# Altium PCB PCB1.PcbDoc (part 1 of 2)
Units mm, origin at the board's own origin, x right, y up, seen from the top; angles counter-clockwise.
Board outline 100 x 90 mm, 2 copper layers (Top Layer, Bottom Layer); 112 components, 100 nets, 469 pads, 191 vias.
Unrouted connection lines stored in the file: 2.
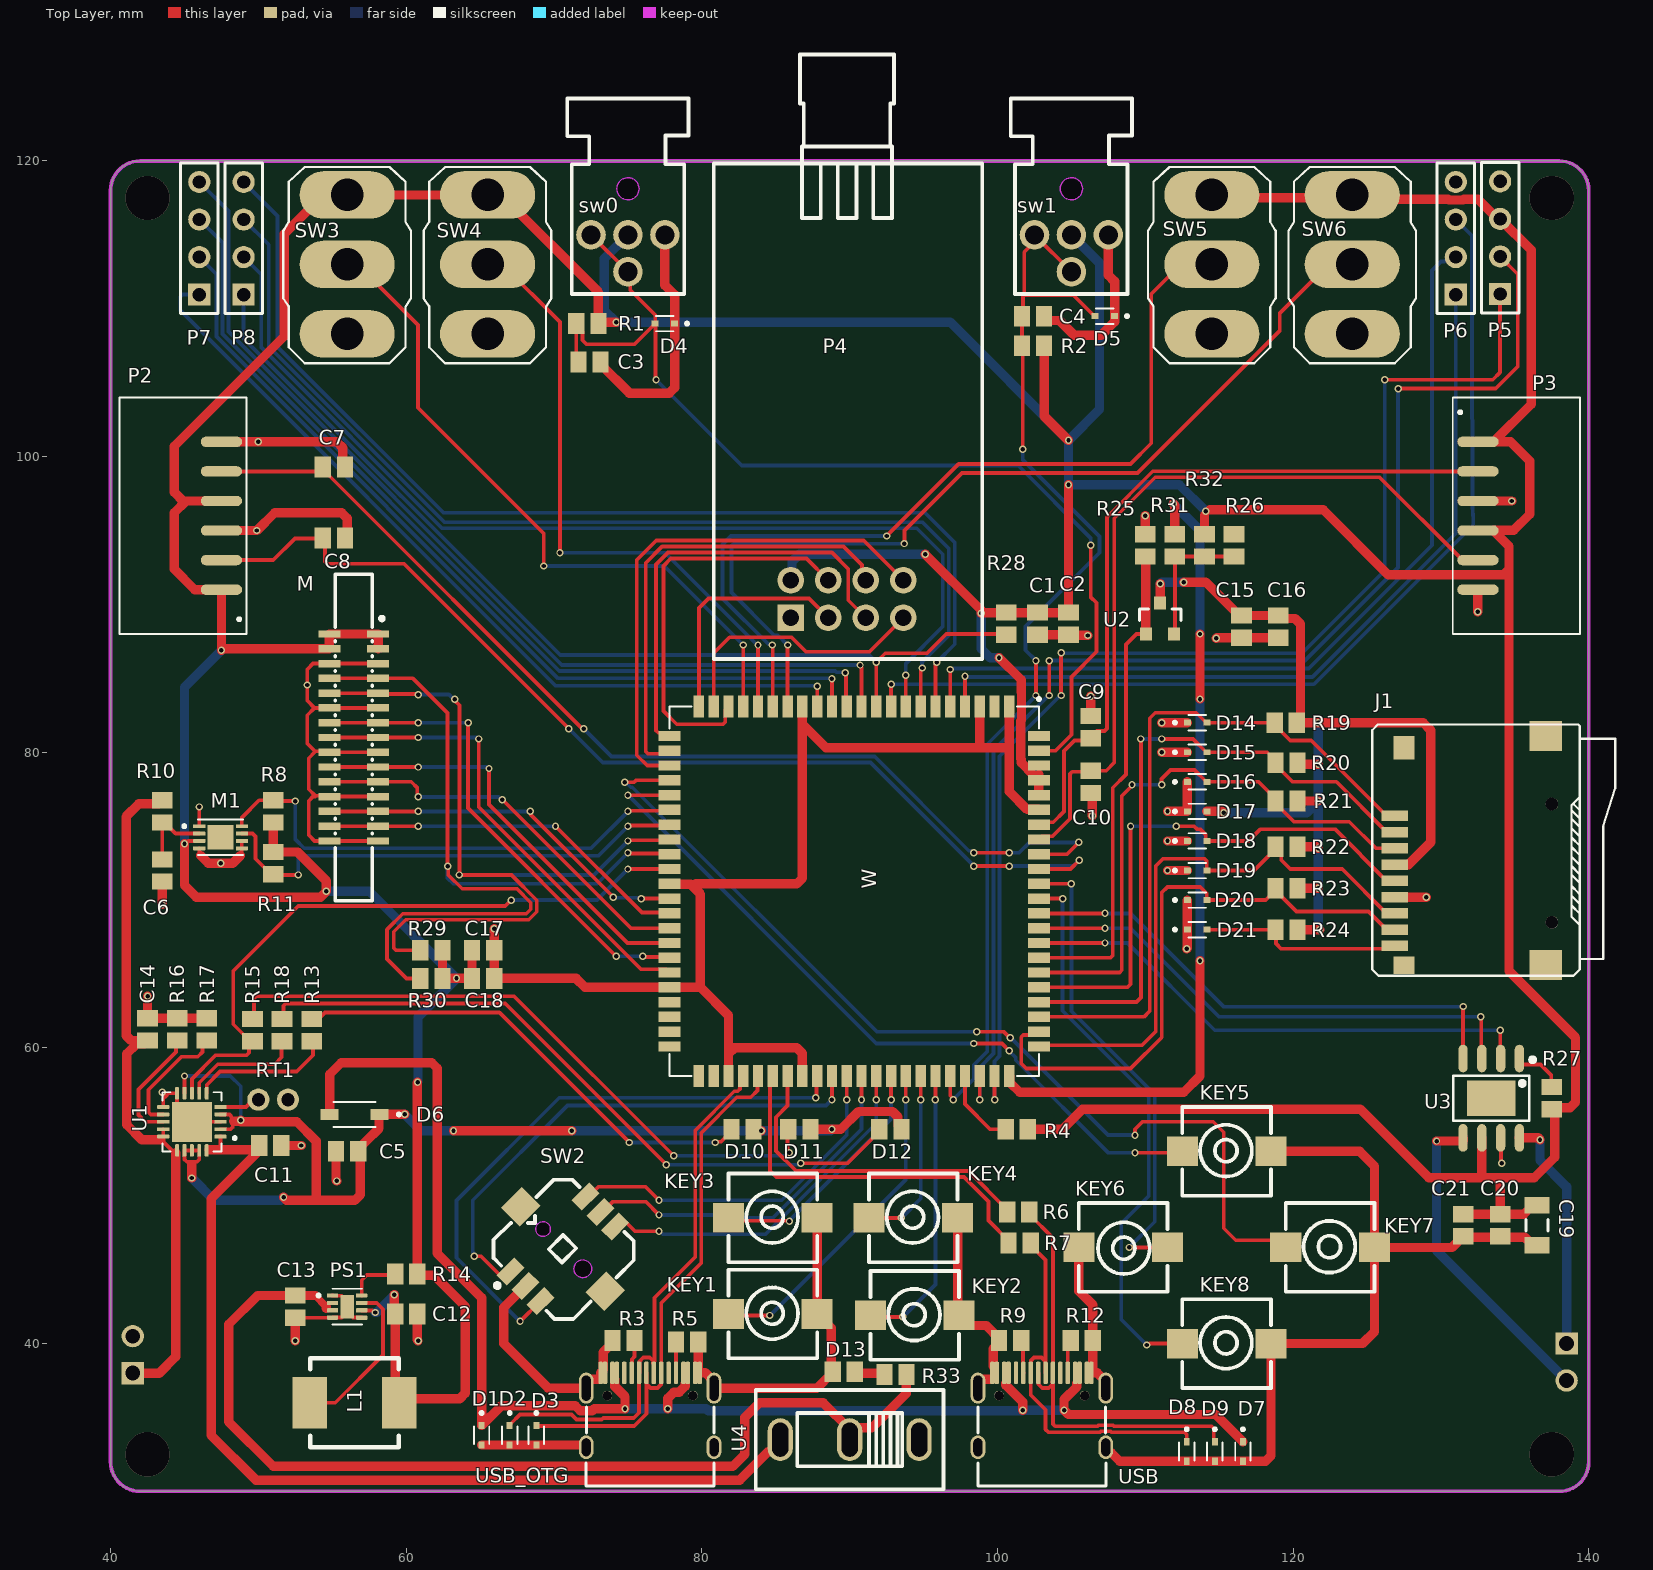
[diagram p0: Top Layer view]
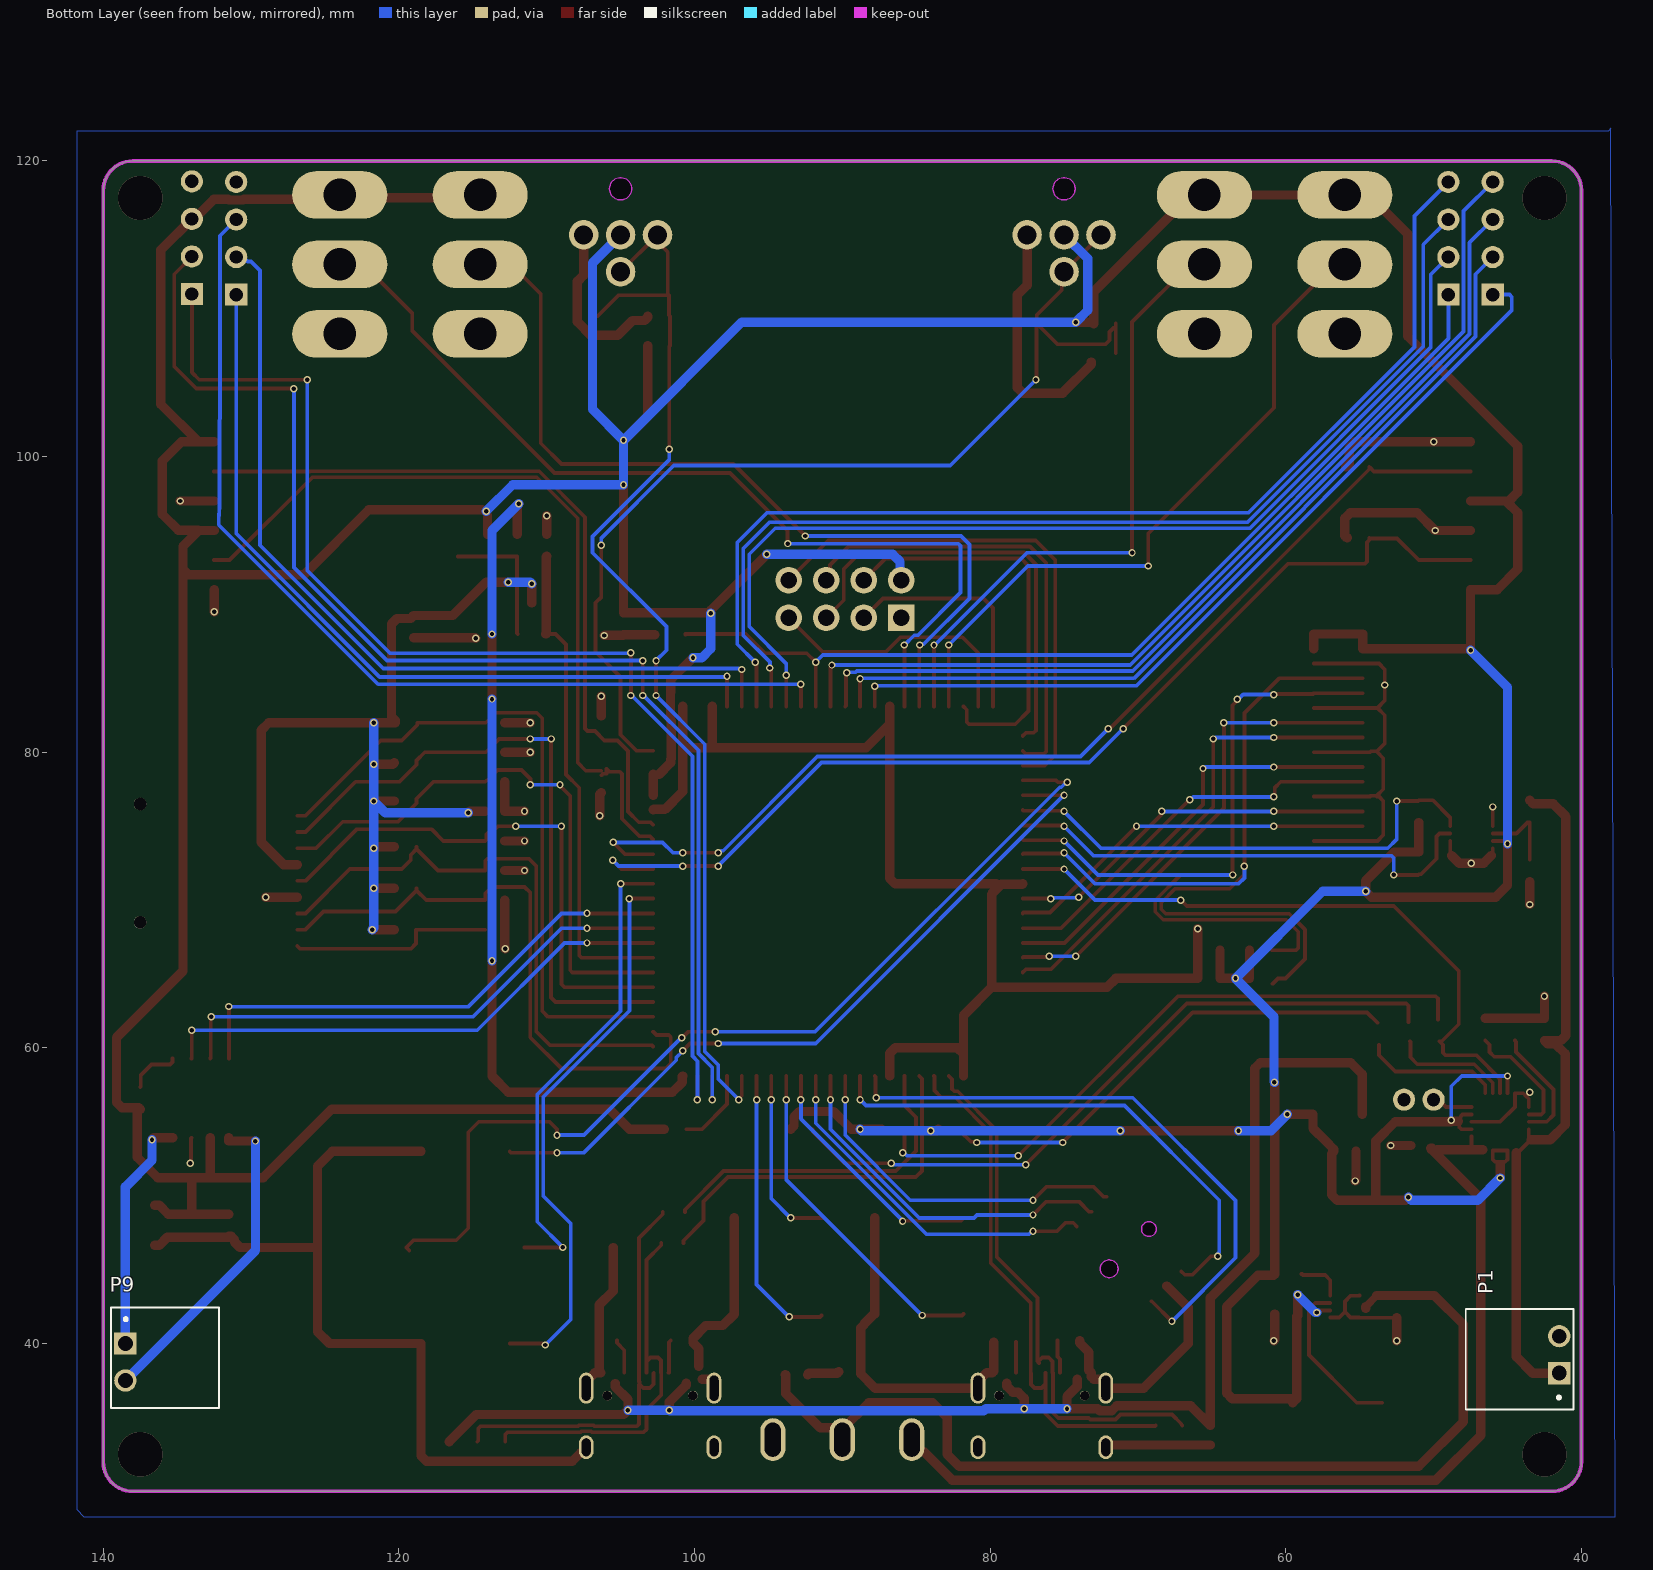
[diagram p1: Bottom Layer view, seen from below]

## Layer stack, top to bottom
Top Solder: solder mask 0.0102, Solder Resist, Dk 3.5
Top Layer: signal copper 0.0356
Dielectric 1: dielectric 0.32, FR-4, Dk 4.8
Bottom Layer: signal copper 0.0356
Bottom Solder: solder mask 0.0102, Solder Resist, Dk 3.5

## Board outline
40,32 40,118 cw(c42,118) 42,120 138,120 cw(c138,118) 140,118 140,32 cw(c138,32) 138,30 42,30 cw(c42,32)

## Design rules (kind name [scope] priority, off if disabled: settings)
Clearance [All] p1: gap=0.152 ignorepadtopadclearanceinfootprint=TRUE
Height [All] p1 off: minheight=0 maxheight=25.4 prefheight=12.7
HoleSize [All] p1: absolutevalues=TRUE maxlimit=5.08 minlimit=0.2 maxpercent=80.000 minpercent=20.000
MinimumSolderMaskSliver [All] p1: minsoldermaskwidth=0.01
PolygonConnect [All] p1: connectstyle=Relief reliefconductorwidth=0.254 reliefentries=4 polygonreliefangle="90 Angle" airgapwidth=0.254
RoutingVias [All] p1: holewidth=0.3 width=0.5 viastyle="Through Hole" minholewidth=0.3 minwidth=0.5 maxholewidth=0.711 maxwidth=1.27
SilkToSilkClearance [All] p1 off: silktosilkclearance=0.254
SilkToSolderMaskClearance [IsPad] p1 off: minsilkscreentomaskgap=0.254 clearancetoexposedcopper=TRUE
SolderMaskExpansion [All] p1: expansion=0.102 istentingtop=FALSE
Width [All] p1: maxlimit=1.27 minlimit=0.254 preferedwidth=0.254 minimp=50.000000 maximp=50.000000 favimp=50.000000
25 further rules are at their usual default settings.

## Classes and differential pairs
component class Sheet2: C15 C16 C17 C18 C19 C20 C21 D14 D15 D16 D17 D18 D19 D20 D21 J1 KEY1 KEY2 KEY3 KEY4 KEY5 KEY6 KEY7 KEY8 M P2 P3 P4 P5 P6 P7 P8 P9 R19 R20 R21 R22 R23 R24 R25 R26 R27 R29 R30 R31 R32 SW2 SW3 SW4 SW5 SW6 U2 U3
component class Sheet1: C1 C2 C3 C4 C5 C6 C7 C8 C9 C10 C11 C12 C13 C14 D1 D2 D3 D4 D5 D6 D7 D8 D9 D10 D11 D12 D13 L1 M1 P1 PS1 R1 R2 R3 R4 R5 R6 R7 R8 R9 R10 R11 R12 R13 R14 R15 R16 R17 R18 R28 R33 RT1 sw0 sw1 U1 U4 USB USB_OTG W

## Components (designator, comment, footprint, x,y, rotation, side; value= is the part's Value field where it differs from the comment)
C1 "0.1uF/50V(10%)" C0805 102.7,88.7 r90 top value=0.1uF
C2 "10uF" C0805 104.8,88.7 r90 top
C3 "0.1uF/50V(10%)" C0805 72.4,106.4 r180 top value=0.1uF
C4 "0.1uF/50V(10%)" C0805 102.4,109.5 r180 top value=0.1uF
C5 "10uF/25V(20%)" C0805 56,53 r0 top
C6 "1uF/16V(10%)" C0805 43.5,72 r270 top
C7 "0.1uF/50V(10%)" C0805 55.1,99.3 r180 top value=0.1uF
C8 "0.1uF/50V(10%)" C0805 55.1,94.5 r180 top value=0.1uF
C9 "0.1uF/50V(10%)" C0805 106.3,81.7 r270 top value=0.1uF
C10 "0.1uF/50V(10%)" C0805 106.3,78 r90 top value=0.1uF
C11 "4.7uF" C0805 50.8,53.4 r0 top
C12 "22uF" C0805 60,42 r180 top
C13 "10uF" C0805 52.5,42.5 r90 top
C14 "4.7uF" C0805 42.5,61.25 r90 top
C15 "10uF/25v(20%)" C0805 116.5,88.5 r90 top value=10uF
C16 "0.1uF/50V(10%)" C0805 119,88.5 r90 top value=0.1uF
C17 "10uF/25v(20%)" C0805 65.2,66.6 r180 top value=10uF
C18 "0.1uF/50V(10%)" C0805 65.2,64.7 r180 top value=0.1uF
C19 "100uF" C1206 136.5,48 r270 top
C20 "1uF" C0805 134,48 r270 top
C21 "0.1uF/50V(10%)" C0805 131.5,48 r270 top value=0.1uF
D1 "" TVS_LESD5D5.0CT1G 65.1,33.8 r270 top
D2 "" TVS_LESD5D5.0CT1G 67,33.8 r270 top
D3 "" TVS_LESD5D5.0CT1G 68.8,33.8 r270 top
D4 "" TVS_LESD5D5.0CT1G 77.5,109 r180 top
D5 "" TVS_LESD5D5.0CT1G 107.26,109.5 r180 top
D6 "1N5819HW-7" SOD3715X145N 56.5,55.5 r180 top
D7 "" TVS_LESD5D5.0CT1G 116.6,32.7 r270 top
D8 "LESD5D5.0CT1G" TVS_LESD5D5.0CT1G 112.8,32.7 r270 top
D9 "" TVS_LESD5D5.0CT1G 114.7,32.7 r270 top
D10 "PG" C0805 82.75,54.5 r180 top
D11 "CHA" C0805 86.6,54.5 r180 top
D12 "DON" C0805 92.75,54.5 r180 top
D13 "PWR" C0805 89.6,38.1 r180 top
D14 "" TVS_LESD5D5.0CT1G 113.5,82 r0 top
D15 "" TVS_LESD5D5.0CT1G 113.5,80 r0 top
D16 "" TVS_LESD5D5.0CT1G 113.5,78 r0 top
D17 "" TVS_LESD5D5.0CT1G 113.5,76 r0 top
D18 "" TVS_LESD5D5.0CT1G 113.5,74 r0 top
D19 "" TVS_LESD5D5.0CT1G 113.5,72 r0 top
D20 "" TVS_LESD5D5.0CT1G 113.5,70 r0 top
D21 "" TVS_LESD5D5.0CT1G 113.5,68 r0 top
J1 "Micro SD" "MICRO SD" 137.1,65.6 r90 top
KEY1 "Button" SWITCH-A6 84.8,42 r0 top
KEY2 "Button" SWITCH-A6 94.4,41.9 r0 top
KEY3 "Button" SWITCH-A6 84.8,48.5 r0 top
KEY4 "Button" SWITCH-A6 94.3,48.5 r0 top
KEY5 "Button" SWITCH-A6 115.5,53 r0 top
KEY6 "Button" SWITCH-A6 108.5,46.5 r180 top
KEY7 "Button" SWITCH-A6 122.5,46.5 r0 top
KEY8 "Button" SWITCH-A6 115.5,40 r0 top
L1 "2.2uH" INDC6060X300 56.5,36 r0 top
M "MIPI_FPC_15PIN" FPC-SMD_15P-P1.00_HDGC_1.0K-GT-15PB 56.45,81 r270 top
M1 "MAX17040G" MAX17040G+T 47.44,74.25 r0 top
P1 "Header 2" XH2.54-2P 40.525,41.75 r90 bottom
P2 "Controller_Left" "PH2.0-6P - SMT" 49.2,96 r90 top
P3 "Controller_Right" "PH2.0-6P - SMT" 130.8,96 r270 top
P4 "NRF24" NRF24 90,104.5 r0 top
P5 "UART_P4" HDR1X4 134,111 r90 top
P6 "UART_C6" HDR1X4 131,110.96 r90 top
P7 "Header 4" HDR1X4 46,110.96 r90 top
P8 "Header 4" HDR1X4 49,110.96 r90 top
P9 "Header 2" XH2.54-2P 139.475,36.25 r270 bottom
PS1 "TPS62162DSGR" TPS62162DSGR 56,42.5 r0 top
R1 "10k(1%)" C0805 72.25,109 r0 top
R2 "10k(1%)" C0805 102.4,107.5 r0 top
R3 "5.1K" C0805 74.7,40.2 r0 top
R4 "10k(1%)" C0805 101.3,54.5 r0 top
R5 "5.1K" C0805 79,40.1 r180 top
R6 "33" C0805 101.4,48.9 r180 top
R7 "33" C0805 101.5,46.8 r180 top
R8 "4.7K(1%)" C0805 51,76 r270 top
R9 "5.1K" C0805 100.85,40.2 r0 top
R10 "1K" C0805 43.5,76 r270 top
R11 "4.7K(1%)" C0805 51,72.5 r90 top
R12 "5.1K" C0805 105.7,40.2 r180 top
R13 "5.1K" C0805 53.6,61.2 r270 top
R14 "100K" C0805 60,44.7 r180 top
R15 "5.1K" C0805 49.6,61.2 r270 top
R16 "1K" C0805 44.5,61.25 r90 top
R17 "5.1K" C0805 46.5,61.25 r90 top
R18 "5.1K" C0805 51.6,61.2 r270 top
R19 "51K" C0805 119.5,82 r180 top
R20 "51K" C0805 119.55,79.3 r180 top
R21 "51K" C0805 119.55,76.7 r180 top
R22 "51K" C0805 119.55,73.6 r180 top
R23 "51K" C0805 119.55,70.8 r180 top
R24 "51K" C0805 119.55,68 r180 top
R25 "10K" C0805 110,94 r270 top
R26 "10K" C0805 116,94 r90 top
R27 "10K" C0805 137.5,56.6 r90 top
R28 "10k(1%)" C0805 100.6,88.7 r90 top
R29 "NC" C0805 61.7,66.6 r0 top
R30 "NC" C0805 61.7,64.7 r0 top
R31 "0" C0805 112,94 r90 top
R32 "NC" C0805 114,94 r90 top
R33 "5.1K" C0805 93.1,37.9 r180 top
RT1 "10K" NTC 50,56.5 r0 top
sw0 "ENAB" SWITH_LIGHT 75,113.75 r180 top
sw1 "BOOT" SWITH_LIGHT 105,113.75 r180 top
SW2 "TM-4175-B-B" TM4175-B-B 70.6,46.4 r45 top
SW3 "MTS-102" MTS-102 56,113 r0 top
SW4 "MTS-102" MTS-102 65.5,113 r0 top
SW5 "MTS-102" MTS-102 114.5,113 r0 top
SW6 "MTS-102" MTS-102 124,113 r0 top
U1 "MCP73871-2CCI/ML" MCP73871 45.5,55 r180 top
U2 "AO3401" A03401 111,89 r0 top
U3 "NS4168" NS4168 133.4,56.6 r180 top
U4 "SWITCH-SS12D10G5-WJ" SW-TH_SS12D10G5 90,33.5 r180 top
USB "Type-C" TYPE-C-TOP 103,35.5 r270 top
USB_OTG "Type-C" TYPE-C-TOP 76.5,35.5 r270 top
W "ESP32-P4" ESP32-P4_MODULE 90.3,70.6 r270 top

## Footprints (in the part's own frame and the unit in brackets; to place one, negate y for a bottom-side part, rotate by r counter-clockwise, add the part's x,y. Pads: shape width x height; smd on the part's side, far side on the other; paste and mask are expansions set on the pad)
A03401 [mm]
  rect 0.8x0.9 smd: 1(-0.95,-1) 2(0.95,-1) 3(0,1.1)
  silkscreen extent -1.4,-0.1 1.4,0.7, body extent -1.45,-1.4 1.45,1.4, height 1.25
C0805 [mm] "Chip Capacitor, Body 2.0x1.3mm, IPC High Density"
  rect 1.1x1.4 smd: 1(-0.75,0) 2(0.75,0)
  body extent -1.1,-0.72 1.1,0.72, height 1.4
C1206 [mm] "Chip Capacitor, Body 3.2x1.6mm, IPC High Density"
  rect 1.1x1.7 smd: 1(-1.35,0) 2(1.35,0)
  silkscreen extent -0.4,-0.75 0.4,0.75, body extent -1.7,-0.9 1.7,0.9, height 1.3
ESP32-P4_MODULE [mm]
  rect 1.5x0.7 smd: 1(-12.5,10.5) 2(-12.5,9.5) 3(-12.5,8.5) 4(-12.5,7.5) 5(-12.5,6.5) 6(-12.5,5.5) 7(-12.5,4.5) 8(-12.5,3.5) 9(-12.5,2.5) 10(-12.5,1.5) 11(-12.5,0.5) 12(-12.5,-0.5) 13(-12.5,-1.5) 14(-12.5,-2.5) 15(-12.5,-3.5) 16(-12.5,-4.5) 17(-12.5,-5.5) 18(-12.5,-6.5) 19(-12.5,-7.5) 20(-12.5,-8.5) 21(-12.5,-9.5) 22(-12.5,-10.5) 45(12.5,-10.5) 46(12.5,-9.5) 47(12.5,-8.5) 48(12.5,-7.5) 49(12.5,-6.5) 50(12.5,-5.5) 51(12.5,-4.5) 52(12.5,-3.5) 53(12.5,-2.5) 54(12.5,-1.5) 55(12.5,-0.5) 56(12.5,0.5) 57(12.5,1.5) 58(12.5,2.5) 59(12.5,3.5) 60(12.5,4.5) 61(12.5,5.5) 62(12.5,6.5) 63(12.5,7.5) 64(12.5,8.5) 65(12.5,9.5) 66(12.5,10.5)
  rect 0.7x1.5 smd: 23(-10.5,-12.5) 24(-9.5,-12.5) 25(-8.5,-12.5) 26(-7.5,-12.5) 27(-6.5,-12.5) 28(-5.5,-12.5) 29(-4.5,-12.5) 30(-3.5,-12.5) 31(-2.5,-12.5) 32(-1.5,-12.5) 33(-0.5,-12.5) 34(0.5,-12.5) 35(1.5,-12.5) 36(2.5,-12.5) 37(3.5,-12.5) 38(4.5,-12.5) 39(5.5,-12.5) 40(6.5,-12.5) 41(7.5,-12.5) 42(8.5,-12.5) 43(9.5,-12.5) 44(10.5,-12.5) 67(10.5,12.5) 68(9.5,12.5) 69(8.5,12.5) 70(7.5,12.5) 71(6.5,12.5) 72(5.5,12.5) 73(4.5,12.5) 74(3.5,12.5) 75(2.5,12.5) 76(1.5,12.5) 77(0.5,12.5) 78(-0.5,12.5) 79(-1.5,12.5) 80(-2.5,12.5) 81(-3.5,12.5) 82(-4.5,12.5) 83(-5.5,12.5) 84(-6.5,12.5) 85(-7.5,12.5) 86(-8.5,12.5) 87(-9.5,12.5) 88(-10.5,12.5)
  silkscreen extent -13.1,-12.5 12.5,12.6, body extent -12.51,-12.46 12.51,12.5, height 2.5
FPC-SMD_15P-P1.00_HDGC_1.0K-GT-15PB [mm]
  rect 0.5x1.5 smd paste+0 mask+0.05: 1(-7,-1.65) 1(-7,1.65) 2(-6,-1.65) 2(-6,1.65) 3(-5,-1.65) 3(-5,1.65) 4(-4,-1.65) 4(-4,1.65) 5(-3,1.65) 5(-3,-1.65) 6(-2,1.65) 6(-2,-1.65) 7(-1,1.65) 7(-1,-1.65) 8(0,1.65) 8(0,-1.65) 9(1,1.65) 9(1,-1.65) 10(2,1.65) 10(2,-1.65) 11(3,1.65) 11(3,-1.65) 12(4,-1.65) 12(4,1.65) 13(5,-1.65) 13(5,1.65) 14(6,-1.65) 14(6,1.65) 15(7,-1.65) 15(7,1.65)
  silkscreen extent -11.05,-1.25 11.05,2.03, body extent -11.05,-2.23 11.05,2.27, height 5.4
HDR1X4 [mm] "Connector; Header; 4 Position"
  rect 1.5x1.5 hole 0.9: 1(0,0)
  round 1.5 hole 0.9: 2(2.54,0) 3(5.08,0) 4(7.62,0)
  silkscreen extent -1.27,-1.27 8.89,1.27, body extent -1.24,-1.33 8.93,1.33, height 8.54
INDC6060X300 [mm]
  rect 2.35x3.5 smd: 1(-3.025,0) 2(3.025,0)
  silkscreen extent -3,-3 3,3, body extent -3.55,-3 3.55,3, height 3
MAX17040G+T [mm]
  rrect25% 0.82x0.26 smd: 1(-1.44,0.75) 2(-1.44,0.25) 3(-1.44,-0.25) 4(-1.44,-0.75) 5(1.44,-0.75) 6(1.44,-0.25) 7(1.44,0.25) 8(1.44,0.75)
  rect 1.75x1.63 smd paste-2: 9(0,0)
  silkscreen extent -2.56,-1.2 1.53,1.2
MCP73871 [mm]
  rrect50% 0.84x0.26 smd: 1(-1.935,1) 2(-1.935,0.5) 3(-1.935,0) 4(-1.935,-0.5) 5(-1.935,-1) 11(1.935,-1) 12(1.935,-0.5) 13(1.935,0) 14(1.935,0.5) 15(1.935,1)
  rrect50% 0.26x0.84 smd: 6(-1,-1.935) 7(-0.5,-1.935) 8(0,-1.935) 9(0.5,-1.935) 10(1,-1.935) 16(1,1.935) 17(0.5,1.935) 18(0,1.935) 19(-0.5,1.935) 20(-1,1.935)
  rect 2.7x2.7 smd paste-2: 21(0,0)
  silkscreen extent -3,-2 2,2, body extent -2,-2 2,2, height 1
"MICRO SD" [mm]
  rect 2.032x2.2 smd: 0(0,0) 0(15.5,0)
  rect 1.2x1.4 smd: 0(0,9.6)
  round 0.85 hole 0.85 unplated: 0(2.9,-0.4) 0(10.9,-0.4)
  rect 1.6x1.4 smd: 0(14.7,9.6)
  rect 0.7x1.8 smd: 1(10.1,10.227) 2(9,10.227) 3(7.9,10.227) 4(6.8,10.227) 5(5.7,10.227) 6(4.6,10.227) 7(3.5,10.227) 8(2.4,10.227) 9(1.3,10.227)
  silkscreen extent -0.72,-4.68 16.27,11.75, body extent -0.27,-4.63 16,10.57, height 1.8
MTS-102 [mm]
  oval 6.432x3.216 hole 2.2: 1(0,4.7) 2(0,0) 3(0,-4.7)
  silkscreen extent -4.32,-6.68 4.32,6.6, body extent -3.97,-6.64 3.93,6.56, height 28.34
NRF24 [mm] "Connector; Header; 4x2 Position"
  rect 1.8x1.8 hole 1.1: 1(-3.99,-15.403)
  round 1.8 hole 1.1: 2(-3.99,-12.863) 3(-1.45,-15.403) 4(-1.45,-12.863) 5(1.09,-15.403) 6(1.09,-12.863) 7(3.63,-15.403) 8(3.63,-12.863)
  silkscreen extent -9.2,-18.2 8.96,22.7, body extent -9.1,-17.75 8.9,25.2, height 4.96
NS4168 [mm]
  oval 0.63x1.865 smd: 1(-1.905,-2.682) 2(-0.635,-2.682) 3(0.635,-2.682) 4(1.905,-2.682) 5(1.905,2.682) 6(0.635,2.682) 7(-0.635,2.682) 8(-1.905,2.682)
  rect 3.3x2.4 smd paste+0 mask+0.05: 9(0,0)
  silkscreen extent -2.95,-2.75 2.58,1.52, body extent -2.45,-3.05 2.45,3.05, height 1.6
NTC [mm] "Connector; Header; 2 Position"
  round 1.5 hole 0.9: 1(0,0) 2(2,0)
"PH2.0-6P - SMT" [mm]
  oval 0.7x2.8 smd: 1(-5,1.7) 2(-3,1.7) 3(-1,1.7) 4(1,1.7) 5(3,1.7) 6(5,1.7)
  silkscreen extent -8,0 8,8.6, body extent -8,0.12 8,8.62, height 5.51
SOD3715X145N [mm]
  rect 1.21x0.73 smd: A(1.68,0) C(-1.68,0)
  silkscreen extent -3.1,-0.85 1.43,0.85, body extent -1.83,-0.77 1.83,0.77, height 1.5
SW-TH_SS12D10G5 [mm]
  oval 1.7x2.9 hole 1.1 slot 2.3 at 90 deg paste+0 mask+0.05: 1(-4.7,0) 2(0,0) 3(4.7,0)
  silkscreen extent -6.35,-3.35 6.35,3.35, body extent -6.33,-3.35 6.37,3.35, height 10.4
SWITCH-A6 [mm]
  rect 2.1x2 smd: 1(-3,0) 2(3,0)
  silkscreen extent -3,-3 3,3, body extent -3.25,-3.01 3.25,2.99, height 5.4
SWITH_LIGHT [mm]
  round 2 hole 1.3: 1(-2.5,-1.25) 2(2.5,-1.25) 3(0,1.25) 4(0,-1.25)
  Keep-Out Layer board cut-out: -0.75,-4.37 -0.676,-4.045 -0.468,-3.784 -0.167,-3.639 0.167,-3.639 0.468,-3.784 0.676,-4.045 0.75,-4.37 0.75,-4.37 0.676,-4.695 0.468,-4.956 0.167,-5.101 -0.167,-5.101 -0.468,-4.956 -0.676,-4.695 -0.75,-4.37
  Keep-Out Layer circle w0.005: c0,-4.37 r0.75
  Keep-Out Layer region: -0.75,-4.37 -0.676,-4.045 -0.468,-3.784 -0.167,-3.639 0.167,-3.639 0.468,-3.784 0.676,-4.045 0.75,-4.37 0.75,-4.37 0.676,-4.695 0.468,-4.956 0.167,-5.101 -0.167,-5.101 -0.468,-4.956 -0.676,-4.695 -0.75,-4.37
  silkscreen extent -4.1,-10.47 4.1,2.74, body extent -4.13,-10.35 4.17,2.85, height 7.91
TM4175-B-B [mm]
  rect 1.7x1 smd: 1(-3.575,1.425) 2(-3.575,0.028) 3(-3.575,-1.425) 4(3.575,1.425) 5(3.575,-0.028) 6(3.575,-1.425)
  rect 2x1.8 smd: 7(0,4.05) 7(0,-4.05)
  Keep-Out Layer board cut-out: -0.354,2.254 -0.165,2.372 0.056,2.397 0.266,2.323 0.423,2.166 0.497,1.956 0.472,1.735 0.354,1.546 0.354,1.546 0.165,1.428 -0.056,1.403 -0.266,1.477 -0.423,1.634 -0.497,1.844 -0.472,2.065 -0.354,2.254
  Keep-Out Layer board cut-out: -0.424,-1.476 -0.198,-1.334 0.067,-1.304 0.319,-1.392 0.508,-1.581 0.596,-1.833 0.566,-2.098 0.424,-2.324 0.424,-2.324 0.198,-2.466 -0.067,-2.496 -0.319,-2.408 -0.508,-2.219 -0.596,-1.967 -0.566,-1.702 -0.424,-1.476
  Keep-Out Layer circle w0.005: c0,1.9 r0.5
  Keep-Out Layer circle w0.005: c0,-1.9 r0.6
  Keep-Out Layer region: -0.354,2.254 -0.165,2.372 0.056,2.397 0.266,2.323 0.423,2.166 0.497,1.956 0.472,1.735 0.354,1.546 0.354,1.546 0.165,1.428 -0.056,1.403 -0.266,1.477 -0.423,1.634 -0.497,1.844 -0.472,2.065 -0.354,2.254
  Keep-Out Layer region: -0.424,-1.476 -0.198,-1.334 0.067,-1.304 0.319,-1.392 0.508,-1.581 0.596,-1.833 0.566,-2.098 0.424,-2.324 0.424,-2.324 0.198,-2.466 -0.067,-2.496 -0.319,-2.408 -0.508,-2.219 -0.596,-1.967 -0.566,-1.702 -0.424,-1.476
  silkscreen extent -5.04,-3.93 3.76,3.76, body extent -3.74,-4.31 3.76,4.19, height 5.98
TPS62162DSGR [mm]
  rrect25% 0.76x0.28 smd: 1(-0.985,0.75) 2(-0.985,0.25) 3(-0.985,-0.25) 4(-0.985,-0.75) 5(0.985,-0.75) 6(0.985,-0.25) 7(0.985,0.25) 8(0.985,0.75)
  rect 0.9x1.6 smd paste-2: 9(0,0)
  silkscreen extent -2.02,-1.21 1,1.21, body extent -1,-1 1,1, height 0.75
TVS_LESD5D5.0CT1G [mm]
  rect 0.48x0.4 smd: 1(-0.66,0) 2(0.66,0)
  silkscreen extent -1.6,-0.52 0.6,0.52, body extent -0.8,-0.4 0.8,0.4, height 0.7
TYPE-C-TOP [mm]
  round 0.65 hole 0.65: 0(-0.98,2.89) 0(-0.98,-2.89)
  oval 1.6x1 hole 0.6 slot 1.2 at 0 deg: 1(2.52,4.325) 2(2.52,-4.325)
  oval 2.1x1 hole 0.6 slot 1.7 at 0 deg: 3(-1.48,-4.325) 4(-1.48,4.325)
  rrect50% 1.5x0.3 smd: A1(-2.52,-3.35) A4(-2.52,-2.55) A5(-2.52,-1.25) A6(-2.52,-0.25) A7(-2.52,0.25) A8(-2.52,1.25) A9(-2.52,2.55) A12(-2.52,3.35) B1(-2.52,3.05) B4(-2.52,2.25) B5(-2.52,1.75) B6(-2.52,0.75) B7(-2.52,-0.75) B8(-2.52,-1.75) B9(-2.52,-2.25) B12(-2.52,-3.05)
  silkscreen extent -0.22,-4.33 5.12,4.33, body extent -2.57,-4.48 5.18,4.47, height 3.26
XH2.54-2P [mm]
  rect 1.508x1.508 hole 1: 1(-3.75,0.975)
  round 1.508 hole 1: 2(-1.25,0.975)
  silkscreen extent -6.2,0 0.6,7.3, body extent -6.51,-0.02 1,7.62, height 5.95

## Part data
C1 C2 C3 C4 C5 C6 C7 C8 C9 C10 C11 C12 C13 C14 C15 C16 C17 C18 C19 C20 C21: library part Cap, "Capacitor", LatestRevisionDate=17-Jul-2002, LatestRevisionNote="Re-released for DXP Platform.", PackageDescription="Radial Cap, Thru-Hole; 2 Leads; 0.3 in Pin Spacing", PackageReference=RAD-0.3, Published=8-Jun-2000, Publisher="Altium Limited"
D1 D2 D3 D4 D5 D7 D9 D14 D15 D16 D17 D18 D19 D20 D21: library part LESD5D5.0CT1G, "Transient Voltage Suppressors for ESD Protection", Package=None, Availability="Not in stock", Check_prices=https://www.snapeda.com/parts/LESD5D5.0CT1G/Leshan+Radio+Co./view-part/?ref=eda, MF="Leshan Radio Co.", MP=LESD5D5.0CT1G, Price=None, SnapEDA_Link=https://www.snapeda.com/parts/LESD5D5.0CT1G/Leshan+Radio+Co./view-part/?ref=snap
D6: "Diode Schottky 40 V 1A Surface Mount SOD-123", Package="SOD-123 Fairchild Semiconductor", Availability="In Stock", Check_prices=https://www.snapeda.com/parts/1N5819HW-7/Diodes+Inc./view-part/?ref=eda, MF="Diodes Inc.", MP=1N5819HW-7, Price=None, Purchase-URL=https://pricing.snapeda.com/search/part/1N5819HW-7/?ref=eda, SnapEDA_Link=https://www.snapeda.com/parts/1N5819HW-7/Diodes+Inc./view-part/?ref=snap
D8: "Transient Voltage Suppressors for ESD Protection", Package=None, Availability="Not in stock", Check_prices=https://www.snapeda.com/parts/LESD5D5.0CT1G/Leshan+Radio+Co./view-part/?ref=eda, MF="Leshan Radio Co.", MP=LESD5D5.0CT1G, Price=None, SnapEDA_Link=https://www.snapeda.com/parts/LESD5D5.0CT1G/Leshan+Radio+Co./view-part/?ref=snap
D10 D11 D12 D13: library part LED0, "Typical INFRARED GaAs LED", LatestRevisionDate=08-Jul-2005, LatestRevisionNote="Mech Layer 1 removed.", PackageDescription="LED; 2 Leads", PackageReference=LED-0, Published=8-Jun-2000, Publisher="Altium Limited"
J1: "Micro SD卡", BOM名称="Micro SD卡", 学习资源=www.ooocke.com, 版权归属=源创客
KEY1 KEY2 KEY3 KEY4 KEY5 KEY6 KEY7 KEY8: "A6按键", Contact Current=50mA, Insulation Resistance=100MΩ, JLCPCB Part Class=扩展库, LCSC Part Name="无声开关 6.0mm*6.0mm*5mm  250G", Manufacturer=韩国韩荣, Manufacturer Part=K2-1817UQ-C4SW-01, Operating Force=250gf@±30gf, Operating Temperature=-25℃~+85℃, Voltage Rating (DC)=12V, Actuator Style=圆形按钮, Add into BOM=yes, Circuit=单刀单掷, Convert to PCB=yes, Datasheet=https://atta.szlcsc.com/upload/public/pdf/source/20210322/C2690010_58F7DD7E136B4BFA712F0D44F3FEADD9.pdf, Device=K2-1817UQ-C4SW-01, Mechanical Life=100000, Mounting Style=立贴, Supplier=LCSC, Supplier Footprint=SMD, Supplier Part=C128939, Switch Height=5mm, Switch Length=6mm, Switch Width=6mm, Symbol=K2-1817UQ-C4SW-01, With Lamp=-
L1: library part L-NR, "NR功率电感", BOM名称=NR功率电感, 学习资源=www.ooocke.com, 版权归属=源创客
M: "立式"
M1: "电量检测"
P1 P9: "Header, 2-Pin", LatestRevisionDate=17-Jul-2002, LatestRevisionNote="Re-released for DXP Platform.", Publisher="Altium Limited"
P2 P3: library part "Header 6", "Header, 6-Pin", LatestRevisionDate=17-Jul-2002, LatestRevisionNote="Re-released for DXP Platform.", Publisher="Altium Limited"
P4: library part "Header 4X2", "Header, 4-Pin, Dual row", LatestRevisionDate=17-Jul-2002, LatestRevisionNote="Re-released for DXP Platform.", Publisher="Altium Limited"
P5 P6: library part "Header 4", "Header, 4-Pin", LatestRevisionDate=17-Jul-2002, LatestRevisionNote="Re-released for DXP Platform.", Publisher="Altium Limited"
P7 P8: "Header, 4-Pin", LatestRevisionDate=17-Jul-2002, LatestRevisionNote="Re-released for DXP Platform.", Publisher="Altium Limited"
PS1: "3V-17V 1A Step-Down Converters with DCS-Controlâ„¢", Package="WSON-8 Texas Instruments", Check_prices=https://www.snapeda.com/parts/TPS62162DSGR/Texas+Instruments/view-part/?ref=eda, MF="Texas Instruments", MP=TPS62162DSGR, SnapEDA_Link=https://www.snapeda.com/parts/TPS62162DSGR/Texas+Instruments/view-part/?ref=snap
R1 R2 R3 R4 R5 R6 R7 R8 R9 R10 R11 R12 R13 R14 R15 R16 R17 R18 R19 R20 R21 R22 R23 R24 R25 R26 R27 R28 R29 R30 R31 R32 R33: library part Res1, "Resistor", LatestRevisionDate=17-Jul-2002, LatestRevisionNote="Re-released for DXP Platform.", PackageDescription="Axial Device, Thru-Hole; 2 Leads; 0.3 in Pin Spacing", PackageReference=AXIAL-0.3, Published=8-Jun-2000, Publisher="Altium Limited"
RT1: library part "Res Thermal", Code_IPC=RESC2012, LatestRevisionDate=29-May-2009, LatestRevisionNote="IPC-7351 Footprint Added.", PackageDescription="Chip Resistor 0805 Case Size", PackageReference=6-0805, PackageVersion=Mar-2003, Published=24-Mar-1999, Publisher="Altium Limited"
sw0 sw1: library part SWITCH_LIGHT
SW2: JLCPCB Part Class=扩展库, LCSC Part Name="7.5*7.5*6五向开关 H6 升级减少摇晃 显示器五向开关", Manufacturer="XKB Connectivity(中国星坤)", Add into BOM=yes, Convert to PCB=yes, Datasheet=https://atta.szlcsc.com/upload/public/pdf/source/20211011/A0F6117F2AB0E02F6CF3847B7456F266.pdf, Device=TM-4175-B-B, Manufacturer Part=TM-4175-B-B, Supplier=LCSC, Supplier Footprint=SMD-8P,7.5x7.5mm, Supplier Part=C465996, Symbol=TM-4175-B-B
SW3 SW4 SW5 SW6: "Rectangular Cable Assemblies .100 Mini Mate Single Row Discrete Wire Cable Assembly, Terminal", Package=None, Availability=Unavailable, Check_prices=https://www.snapeda.com/parts/MTS102/Motorola/view-part/698799/?ref=eda, MF=Motorola, MP=MTS102, Price=None, SnapEDA_Link=https://www.snapeda.com/parts/MTS102/Motorola/view-part/698799/?ref=snap
U1: "Charger IC Lithium Ion/Polymer 20-QFN (4x4)", Package="QFN-20 Microchip", Availability="In Stock", Check_prices=https://www.snapeda.com/parts/MCP73871-2CCI/ML/Microchip/view-part/?ref=eda, MF="Microchip Technology", MP=MCP73871-2CCI/ML, Price=None, Purchase-URL=https://pricing.snapeda.com/search/part/MCP73871-2CCI/ML/?ref=eda, SnapEDA_Link=https://www.snapeda.com/parts/MCP73871-2CCI/ML/Microchip/view-part/?ref=snap
U2: "P-Channel 30 V 4A (Ta) 1.4W (Ta) Surface Mount SOT-23-3", Package="SOT-23-3 Alpha &amp; Omega Semiconductor", Check_prices=https://www.snapeda.com/parts/AO3401/Alpha/view-part/?ref=eda, MF="Alpha & Omega Semiconductor", MP=AO3401, SnapEDA_Link=https://www.snapeda.com/parts/AO3401/Alpha/view-part/?ref=snap
USB USB_OTG: library part USB-Type-C-TOP
W: library part ESP32-P4-Module, "ESP32P4+ESP32C6", Package=QFN-24_4x4x05P, SuppliersPartNumber=C24112, ComponentLink1Description=供应商链接, ComponentLink1URL=http://www.szlcsc.com/product/details_24852.html, Supplier=LC
U3: Add into BOM=yes, Convert to PCB=yes, Device=NS4168, Symbol=NS4168

## Via types
v1: diameter 0.5, hole 0.3, Top Layer to Bottom Layer, tented both sides, 187 vias
v2: diameter 3, hole 3, Top Layer to Bottom Layer, tented both sides, 4 vias

## Nets (pads, with @x,y where several pads share a name; then routed paths per layer and width w, separated by ;. In a path a pad name is that pad's centre, name@x,y a point inside that pad or via, vN(x,y) a via of type N, cw(c..) or ccw(c..) an arc to the next point about the centre after c; other vN are vias at no path point)
BUTTON_F1: SW2.5 W.56 | length 24.5
  Top Layer w0.254: SW2.5@73.148,48.908 73.295,48.908 73.986,49.6 76.2,49.6 v1(77.1,48.7) ; v1(90.8,56.5) W.56@90.8,58.1
  Bottom Layer w0.254: v1(77.1,48.7) 80.883,48.7 81.083,48.5 84.8,48.5 90.8,54.5 v1(90.8,56.5)
BUTTON_F2: SW2.1 W.54 | length 35.6
  Top Layer w0.254: v1(64.6,45.9) 65.068,45.9 66.312,44.655 66.84,44.655 SW2.1@67.064,44.88 ; v1(88.8,56.5) W.54@88.8,58.1
  Bottom Layer w0.254: v1(64.6,45.9) 64.553,45.947 64.553,46.119 64.5,46.172 64.5,49.7 70.9,56.1 88.4,56.1 v1(88.8,56.5)
BUTTON_F3: SW2.6 W.57 | length 24.4
  Top Layer w0.254: SW2.6@74.136,47.92 74.383,48.168 74.911,48.168 75.478,47.6 v1(77.1,47.6) ; v1(91.8,56.5) W.57@91.8,58.1
  Bottom Layer w0.254: v1(77.1,47.6) 77.167,47.6 77.367,47.4 84.3,47.4 91.8,54.9 v1(91.8,56.5)
BUTTON_F4: SW2.3 W.53 | length 40.6
  Top Layer w0.254: v1(67.7,41.5) 69.064,42.864 SW2.3@69.08,42.864 ; v1(87.7,56.629) 87.747,56.676 87.747,58.047 W.53@87.8,58.1
  Bottom Layer w0.254: v1(67.7,41.5) 63.4,45.8 63.4,49.675 70.355,56.629 v1(87.7,56.629)
BUTTON_F5: SW2.4 W.55 | length 24.2
  Top Layer w0.254: SW2.4@72.12,49.936 72.322,49.936 72.986,50.6 76.2,50.6 v1(77.1,49.7) ; v1(89.8,56.5) W.55@89.8,58.1
  Bottom Layer w0.254: v1(77.1,49.7) 85.4,49.7 89.8,54.1 v1(89.8,56.5)
C6_IO4: P7.1 W.14 | length 57.2
  Top Layer w0.254: W.14@87.8,83.1 v1(87.8,84.471)
  Bottom Layer w0.254: P7.1@46,110.96 44.869,110.96 44.72,110.811 44.72,109.88 70.1,84.5 87.771,84.5 v1(87.8,84.471)
C6_IO5: P7.2 W.13 | length 59
  Top Layer w0.254: W.13@88.8,83.1 v1(88.8,84.964)
  Bottom Layer w0.254: P7.2@46,113.5 47.158,112.342 47.158,108.118 70.276,85 88.764,85 v1(88.8,84.964)
C6_IO6: P7.3 W.12 | length 62.3
  Top Layer w0.254: v1(89.7,85.371) 89.747,85.324 89.747,83.153 W.12@89.8,83.1
  Bottom Layer w0.254: P7.3@46,116.04 47.564,114.476 47.564,108.286 70.357,85.494 89.019,85.494 89.095,85.418 89.653,85.418 v1(89.7,85.371)
C6_IO7: P7.4 W.11 | length 65.9
  Top Layer w0.254: v1(90.7,85.9) 90.7,85.833 90.8,85.733 W.11@90.8,83.1
  Bottom Layer w0.254: P7.4@46,118.58 47.971,116.609 47.971,108.455 70.525,85.9 v1(90.7,85.9)
C6_IO8: P8.1 R28.1 W.10 | length 67.5
  Top Layer w0.254: W.10@91.8,83.1 v1(91.8,86.1) 92.4,86.7 95.225,86.7 96.525,88 100.6,88 R28.1@100.6,87.95
  Bottom Layer w0.254: P8.1@49,110.96 49,108 70.423,86.577 91.323,86.577 v1(91.8,86.1)
C6_IO9: P6.3 W.9 | length 66.5
  Top Layer w0.254: W.9@92.8,83.1 v1(92.8,84.6)
  Bottom Layer w0.254: v1(92.8,84.6) 121.4,84.6 132.114,95.314 132.13,95.331 132.183,95.384 132.183,95.689 132.13,96.657 132.1,108.395 132.1,108.605 132.1,114.94 P6.3@131,116.04
C6_IO13: P8.2 W.8 | length 69.8
  Top Layer w0.254: W.8@93.8,83.1 v1(93.8,85.2)
  Bottom Layer w0.254: P8.2@49,113.5 50.2,112.3 50.2,107.375 62.416,95.159 94.541,95.159 96.3,93.4 96.3,88.5 93.8,86 v1(93.8,85.2)
C6_IO14: P8.3 W.7 | length 72.4
  Top Layer w0.254: W.7@94.8,83.1 94.8,85.533 94.9,85.633 v1(94.9,85.7)
  Bottom Layer w0.254: P8.3@49,116.04 50.7,114.34 50.7,107.449 62.584,95.565 94.935,95.565 96.706,93.794 96.706,87.906 94.9,86.1 v1(94.9,85.7)
C6_IO15: P8.4 W.6 | length 75
  Top Layer w0.254: W.6@95.8,83.1 95.8,85.933 95.9,86.033 v1(95.9,86.1)
  Bottom Layer w0.254: P8.4@49,118.58 51.3,116.28 51.3,107.424 62.524,96.2 95.1,96.2 97.113,94.187 97.113,87.313 v1(95.9,86.1)
C6_UART_RX: P6.1 W.4 | length 55.4
  Top Layer w0.254: W.4@97.8,83.1 v1(97.8,85.129)
  Bottom Layer w0.254: v1(97.8,85.129) 97.829,85.1 121.299,85.1 131,94.801 P6.1@131,110.96
C6_UART_TX: P6.2 W.5 | length 59.2
  Top Layer w0.254: W.5@96.8,83.1 v1(96.8,85.6)
  Bottom Layer w0.254: v1(96.8,85.6) 96.847,85.647 97.021,85.647 97.033,85.659 121.059,85.659 129.4,94 129.4,112.6 130,113.2 130.228,113.2 130.29,113.262 130.762,113.262 P6.2@131,113.5
C_LEFT_X: C8.2 P2.2 W.79 | length 71.8
  Top Layer w0.254: P2.2@47.5,93 51,93 52.468,94.468 C8.2@54.318,94.468 ; C8.2@54.35,94.5 54.35,94.35 54.5,94.2 54.5,92.906 54.649,92.757 59.843,92.757 v1(71,81.6) ; v1(98.4,72.3) v1(100.8,72.3) ; W.79@102.8,72.1 104.933,72.1 v1(105.533,72.7)
  Bottom Layer w0.254: v1(71,81.6) 73.3,79.3 91.4,79.3 v1(98.4,72.3) ; v1(100.8,72.3) 105.133,72.3 v1(105.533,72.7)
C_LEFT_Y: C7.2 P2.5 W.80 | length 72.2
  Top Layer w0.254: P2.5@47.5,99 54.05,99 C7.2@54.275,99.225 ; C7.2@54.35,99.3 54.35,99.15 71.853,81.647 71.953,81.647 v1(72,81.6) ; v1(98.4,73.2) v1(100.8,73.2) ; W.80@102.8,73.1 104.7,73.1 v1(105.5,73.9)
  Bottom Layer w0.254: v1(72,81.6) 73.894,79.706 91.694,79.706 98.058,73.342 98.191,73.342 98.333,73.2 v1(98.4,73.2) ; v1(100.8,73.2) 101.458,73.2 102.158,73.9 v1(105.5,73.9)
C_RIGHT_X: C9.2 P3.2 W.82 | length 50.4
  Top Layer w0.254: W.82@102.8,75.1 102.965,75.265 103.765,75.265 104.494,75.994 104.494,80.094 105.2,80.8 106.1,80.8 106.732,81.432 107.232,81.432 107.4,81.6 107.4,95.899 110.507,99.006 126.018,99.006 126.025,99 P3.2@132.5,99
C_RIGHT_Y: C10.2 P3.5 W.81 | length 54.1
  Top Layer w0.254: W.81@102.8,74.1 103.015,74.315 103.715,74.315 104.9,75.5 104.9,78.539 105.049,78.687 105.749,78.687 105.95,78.888 105.95,78.55 106.188,78.55 C10.2@106.3,78.438 ; C10.2@106.3,78.75 107.35,78.75 107.9,79.3 107.9,95.825 110.675,98.6 125.85,98.6 131.45,93 P3.5@132.5,93
CHIP_PU: C3.2 D4.2 R1.1 sw0.2 sw0.3 W.87 | length 70.6
  Top Layer w0.254: C3.2@71.5,107 R1.1@71.5,108.7 ; R1.1@71.5,109 71.5,108.85 R1.1@71.5,108.7 ; sw0.2@72.5,115 sw0.3@75,112.5 ; sw0.3@74.829,112.018 75.153,111.693 75.153,111.268 76.84,109.581 D4.2@76.84,109 ; v1(76.9,105.2) 76.87,105.23 76.87,108.97 D4.2@76.84,109 ; W.87@102.8,80.1 103.921,80.1 105,81.179 105,85.1 106.697,86.797 106.697,90.114 106.3,90.511 v1(106.3,94) ; R1.1@71.5,108.7 71.65,108.7 71.923,108.427 71.923,107.877 72.2,107.6 75.44,107.6 76.727,108.887 76.727,108.927 76.8,109 D4.2@76.84,109
  Bottom Layer w0.254: v1(76.9,105.2) 82.7,99.4 101.4,99.4 106.3,94.5 v1(106.3,94)
DSI_CLKN: M.11 W.36 | length 27.4
  Top Layer w0.254: M.11@54.8,78 M.11@58.1,78 60.333,78 60.753,77.581 60.753,77.047 v1(60.8,77) ; v1(66.5,76.8) 75.2,68.1 W.36@77.8,68.1
  Bottom Layer w0.254: v1(60.8,77) 60.829,76.971 66.263,76.971 66.433,76.8 v1(66.5,76.8)
DSI_CLKP: M.10 W.37 | length 29.4
  Top Layer w0.254: M.10@54.8,79 M.10@58.1,79 59.7,79 v1(60.8,79) ; v1(65.6,78.9) 65.6,76.471 74.971,67.1 W.37@77.8,67.1
  Bottom Layer w0.254: v1(60.8,79) 65.433,79 65.533,78.9 v1(65.6,78.9)
DSI_DATAN0: M.8 W.39 | length 32.3
  Top Layer w0.254: M.8@54.8,81 M.8@58.1,81 v1(60.8,81) ; v1(64.9,80.9) 64.9,76.3 75.877,65.323 77.577,65.323 W.39@77.8,65.1
  Bottom Layer w0.254: v1(60.8,81) 64.733,81 64.833,80.9 v1(64.9,80.9)
DSI_DATAN1: M.14 W.35 | length 25.4
  Top Layer w0.254: M.14@54.8,75 M.14@58.1,75 v1(60.8,75) ; v1(70.1,75) 75.944,69.156 77.744,69.156 W.35@77.8,69.1
  Bottom Layer w0.254: v1(60.8,75) v1(70.1,75)
DSI_DATAP0: M.7 W.38 | length 33
  Top Layer w0.254: M.7@54.8,82 M.7@58.1,82 v1(60.8,82) ; v1(64.2,82) 64.176,81.976 64.176,76.224 v1(74.2,66.2) ; v1(76,66.2) 76.047,66.153 77.747,66.153 W.38@77.8,66.1
  Bottom Layer w0.254: v1(60.8,82) v1(64.2,82) ; v1(74.2,66.2) v1(76,66.2)
DSI_DATAP1: M.13 W.34 | length 25.6
  Top Layer w0.254: M.13@54.8,76 M.13@58.1,76 v1(60.8,76) ; v1(68.4,76) 68.447,75.953 68.447,75.753 v1(74,70.2) ; v1(75.9,70.1) W.34@77.8,70.1
  Bottom Layer w0.254: v1(60.8,76) v1(68.4,76) ; v1(74,70.2) 74.047,70.153 75.673,70.153 75.679,70.147 75.853,70.147 v1(75.9,70.1)
DSI_SCL: M.5 R29.1 W.30 | length 55.8
  Top Layer w0.254: M.5@54.8,84 M.5@58.1,84 58.153,83.947 60.753,83.947 v1(60.8,83.9) ; R29.1@60.95,66.6 59.304,66.6 59.155,66.749 59.155,67.855 59.964,68.664 68.288,68.664 68.836,69.212 68.836,69.988 67.123,71.7 v1(63.6,71.7) 63.6,83.185 63.276,83.509 v1(63.276,83.576) ; v1(75,74) 75.047,74.047 77.747,74.047 W.30@77.8,74.1
  Bottom Layer w0.254: v1(60.8,83.9) 62.885,83.9 63.209,83.576 v1(63.276,83.576) ; v1(63.6,71.7) 72.7,71.7 v1(75,74)
DSI_SDA: M.4 R30.1 W.31 | length 58.8
  Top Layer w0.254: M.4@54.8,85 60.449,85 62.8,82.649 v1(62.8,72.3) 62.847,72.253 62.847,71.704 63.79,70.762 67.487,70.762 68.429,69.819 68.429,69.381 68.119,69.071 59.771,69.071 58.7,68 58.7,66.019 60.019,64.7 60.527,64.7 60.895,64.332 R30.1@60.918,64.332 ; v1(75,73.2) 75.047,73.153 77.747,73.153 W.31@77.8,73.1
  Bottom Layer w0.254: v1(62.8,72.3) 62.8,71.5 63.2,71.1 72.9,71.1 v1(75,73.2)
ESP_LDO_VO4: R31.2 W.66 | length 55.6
  Top Layer w0.635: W.66@100.8,58.1 100.833,58.067 100.833,57.667 101.5,57 112.6,57 113.7,58.1 v1(113.7,65.9) ; v1(111.9,96.8) 112,96.7 R31.2@112,94.75 ; v1(113.7,83.6) v1(113.7,88)
  Bottom Layer w0.635: v1(111.9,96.8) 113.7,95 v1(113.7,88) ; v1(113.7,65.9) v1(113.7,83.6)